# EAGLE board quad_sensor_board_v3 (EAGLE 9.0.0)
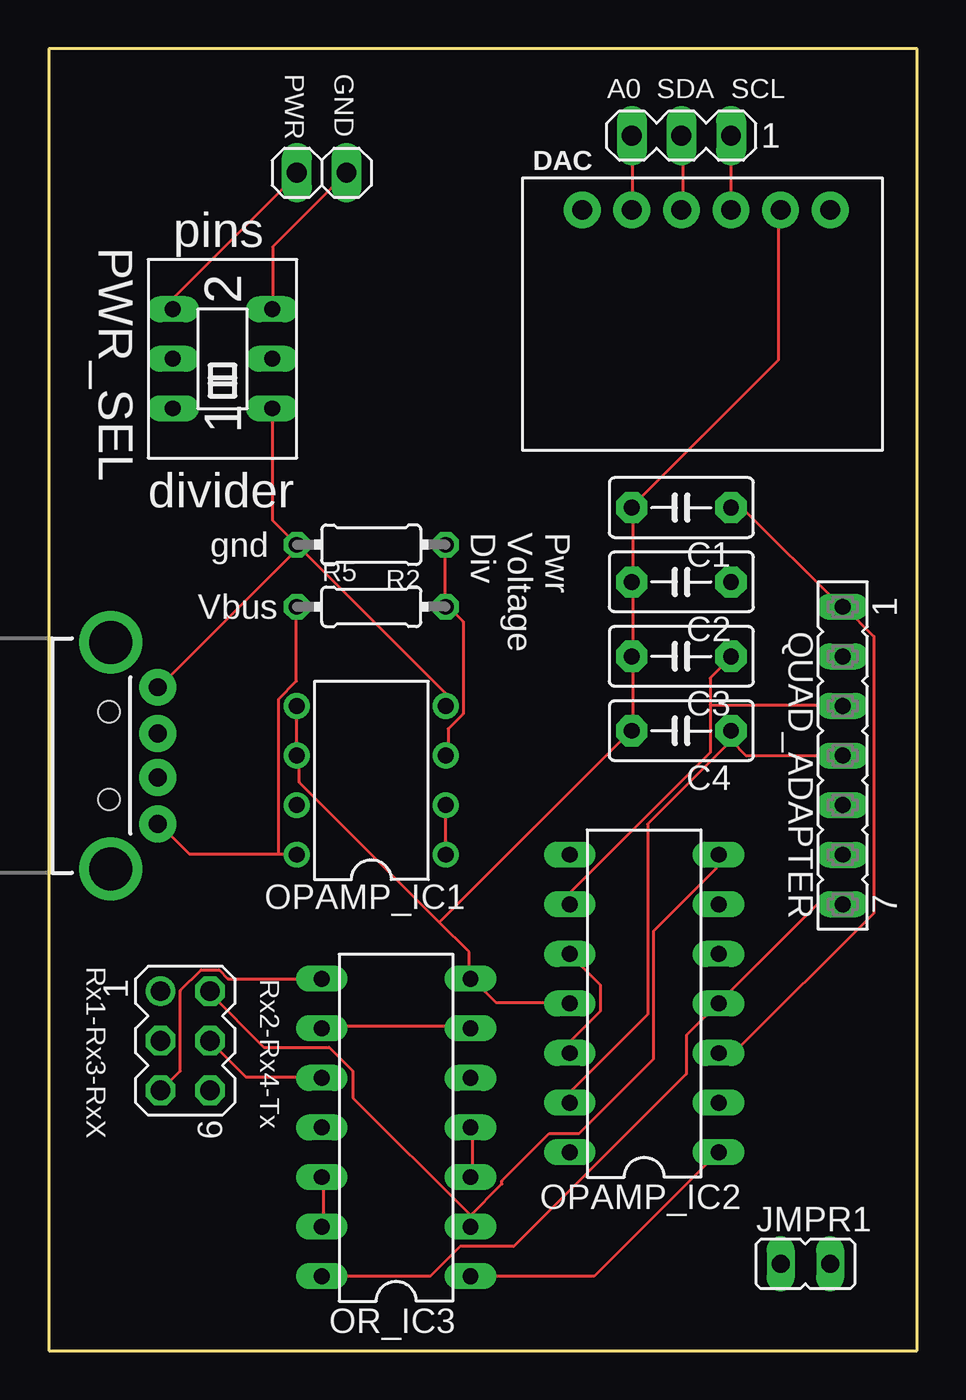
[diagram p0: board, top side]
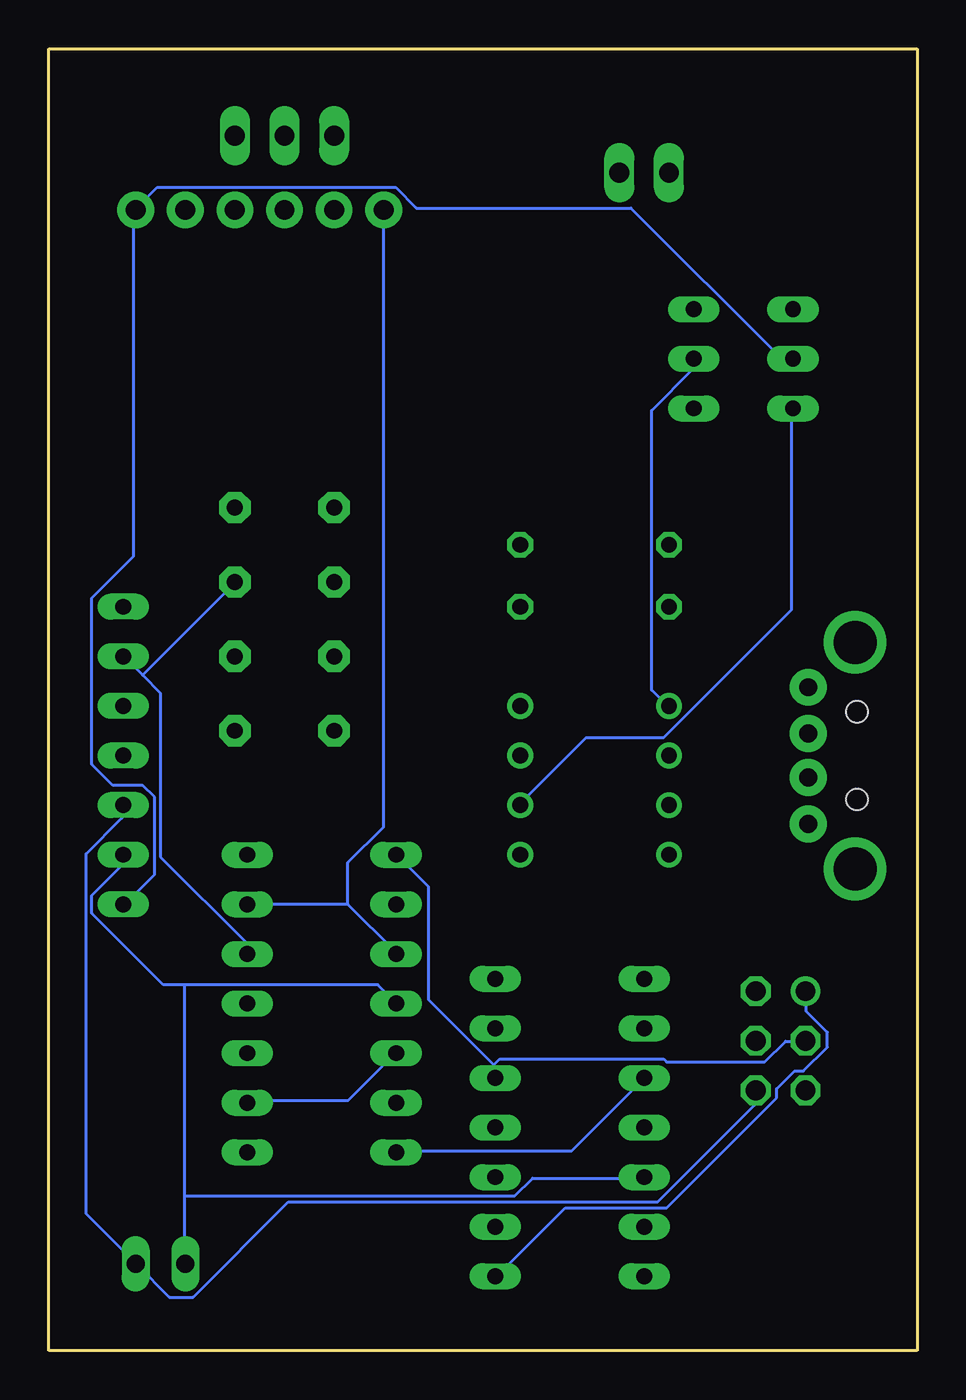
[diagram p1: board, bottom side, seen from below]

Size 44.45 x 66.67 mm. Coordinates in mm from the lower left corner, seen from the top.
Outline: 0,66.67 0,0 44.45,0 44.45,66.67 0,66.67
Copper layers (1*16): Top 0.035mm / dielectric 1.5mm / Bottom 0.035mm
Design rules "default": minimum track width 6mil, minimum drill 0.35mm, track to track 6mil, track to pad 6mil, pad to pad 6mil, via to via 6mil, smd to smd 6mil, copper to edge 40mil, drill to drill 6mil, minimum pad ring 10mil, minimum via ring 8mil, stop-mask expansion 4mil, vias tented up to drill 0mil, thermal gap 10mil

## Footprints (pad centres in the part's own frame; a part is rotated, then mirrored left to right if it is on the bottom)
C5B3 = drill 0.813 pad 1.6 octagon: 1 -2.54,0; 2 2.54,0
1X06_NO_SILK = drill 1.016 pad 1.88: 1 0,0; 2 2.54,0; 3 5.08,0; 4 7.62,0; 5 10.16,0; 6 12.7,0
MA03-1 = drill 1.016 long: 1 -2.54,0; 2 0,0; 3 2.54,0
MA03-2 = drill 1.016: 1 -2.54,-1.27 | drill 1.016 octagon: 2 -2.54,1.27; 3 0,-1.27; 4 0,1.27; 5 2.54,-1.27; 6 2.54,1.27
USB-A-H = drill 0.914 pad 1.88: D+ 2.4,1.127; D- 2.4,-1.127; GND 2.4,3.5; VBUS 2.4,-3.5 | drill 2.2: SHLD1 0,-5.8; SHLD2 0,5.8 | hole 1.1: -0.1,2.25; -0.1,-2.25
JP1 = drill 0.914 long: 1 0,-1.27; 2 0,1.27
DIL08 = drill 0.813 pad 1.27: 1 -3.81,-3.81; 2 -1.27,-3.81; 3 1.27,-3.81; 4 3.81,-3.81; 5 3.81,3.81; 6 1.27,3.81; 7 -1.27,3.81; 8 -3.81,3.81
DIL14 = drill 0.813 long: 1 -7.62,-3.81; 2 -5.08,-3.81; 3 -2.54,-3.81; 4 0,-3.81; 5 2.54,-3.81; 6 5.08,-3.81; 7 7.62,-3.81; 8 7.62,3.81; 9 5.08,3.81; 10 2.54,3.81; 11 0,3.81; 12 -2.54,3.81; 13 -5.08,3.81; 14 -7.62,3.81
1X02 = drill 1.016 long: 1 -1.27,0; 2 1.27,0
FE07 = drill 0.813 long: 1 -7.62,0; 2 -5.08,0; 3 -2.54,0; 4 0,0; 5 2.54,0; 6 5.08,0; 7 7.62,0
0204/7 = drill 0.813 octagon: 1 -3.81,0; 2 3.81,0
A68-A31 = drill 0.813 long: 1 -2.54,-2.54; 2 0,-2.54; 3 2.54,-2.54; 4 -2.54,2.54; 5 0,2.54; 6 2.54,2.54

## Placement (x,y rotation side)
C1  [C5B3]  32.38,43.18 180 top
C2  [C5B3]  32.38,39.37 180 top
C3  [C5B3]  32.38,35.56 180 top
C4  [C5B3]  32.38,31.75 180 top
DAC  [1X06_NO_SILK]  27.3,58.42 0 top
I2C  [MA03-1]  32.38,62.23 180 top
I/O  [MA03-2]  6.98,15.87 270 top
J1  USB_A_PTH_MALE  [USB-A-H]  3.18,30.48 0 top
JMPR1  [JP1]  38.73,4.45 270 top
OPAMP_IC1  LM358N  [DIL08]  16.51,29.21 90 top
OPAMP_IC2  LM324N  [DIL14]  30.48,17.78 90 top
OR_IC3  7432N  [DIL14]  17.78,11.43 90 top
PWR  [1X02]  13.97,60.33 0 top
QUAD_ADAPTER  [FE07]  40.64,30.48 270 top
R2  [0204/7]  16.51,41.27 180 top
R5  [0204/7]  16.51,38.1 0 top
S1  [A68-A31]  8.89,50.8 90 top

## Library data of the parts
C1-C4 = capacitor-wima
DAC = SparkFun-Connectors
I2C I/O = con-lstb; OC_FARNELL: unknown; OC_NEWARK: unknown
J1 = SparkFun-Connectors; PROD_ID: CONN-08367; SF_ID: PRT-00437
JMPR1 = jumper
OPAMP_IC1 OPAMP_IC2 = linear
OR_IC3 = 74xx-us
PWR = pinhead
QUAD_ADAPTER = con-lsta; OC_FARNELL: unknown; OC_NEWARK: unknown
R2 R5 = resistor
S1 = switch

## Nets
GND: C1.2 C2.2 C3.2 C4.2 DAC.5 JMPR1.1 OPAMP_IC1.5 OPAMP_IC1.6 OPAMP_IC2.11 OR_IC3.7 OR_IC3.12 OR_IC3.13 QUAD_ADAPTER.6 S1.2
N$1: OPAMP_IC1.3 R2.1 R5.2
N$2: J1.VBUS OPAMP_IC1.8 R5.1
N$3: OR_IC3.3 OR_IC3.4
N$4: I/O.4 OPAMP_IC2.14 OR_IC3.10
N$5: OPAMP_IC1.1 OPAMP_IC1.2 S1.4
N$6: OR_IC3.6 OR_IC3.9
N$7: DAC.4 I2C.1
N$8: DAC.3 I2C.2
N$9: DAC.2 I2C.3
N$11: I/O.1 OPAMP_IC2.1 OR_IC3.1
N$13: J1.GND OPAMP_IC1.4 R2.2 S1.1
N$14: PWR.2 S1.3
N$15: PWR.1 S1.6
OR_PIN: I/O.5 OR_IC3.8
RX_1: C1.1 OPAMP_IC2.3 QUAD_ADAPTER.1
RX_2: C2.1 OPAMP_IC2.5 QUAD_ADAPTER.2
RX_3: C3.1 OPAMP_IC2.9 QUAD_ADAPTER.3
RX_4: C4.1 OPAMP_IC2.13 QUAD_ADAPTER.4
RX_PIN1: I/O.3 OPAMP_IC2.8 OR_IC3.5
RX_PIN2: I/O.2 OPAMP_IC2.7 OR_IC3.2
THRESH: DAC.1 OPAMP_IC2.2 OPAMP_IC2.6 OPAMP_IC2.10 OPAMP_IC2.12
TX_1: I/O.6 JMPR1.2 QUAD_ADAPTER.5
VCC: DAC.6 OPAMP_IC2.4 OR_IC3.14 QUAD_ADAPTER.7 S1.5

## Tracks (layer width: path | path; a pad name or v marks a point on that pad's centre or on a via)
GND
  Top 0.152: DAC.5 37.36,58.37 37.36,50.75 29.9,43.28 C1.2 29.9,43.13 29.9,39.47 C2.2 29.9,39.32 29.9,35.66 C3.2 29.9,35.51 29.9,31.85 C4.2 29.74,31.7 19.99,21.95 | OPAMP_IC1.5 12.68,32.92 12.68,30.48 OPAMP_IC1.6 12.83,30.48 12.83,29.11 19.99,21.95 | OR_IC3.13 14.05,6.4 14.05,8.84 OR_IC3.12 | OPAMP_IC2.11 26.54,17.83 22.88,17.83 21.67,19.05 OR_IC3.7 21.51,19.05 21.51,20.42 19.99,21.95
  Bottom 0.152: S1.2 11.46,50.75 11.46,50.29 13.59,48.16 13.59,33.83 12.83,33.07 OPAMP_IC1.5 | 37.52,18.75 27.61,18.75 26.7,17.83 OPAMP_IC2.11 | 37.52,18.75 38.58,18.75 42.24,22.4 42.24,23.32 40.72,24.84 40.72,25.3 QUAD_ADAPTER.6 | 37.52,18.75 37.52,7.92 | 37.52,7.92 37.52,4.57 JMPR1.1 | 37.52,7.92 20.6,7.92 19.69,8.84 14.05,8.84 OR_IC3.12
N$1
  Top 0.152: OPAMP_IC1.3 20.45,30.48 20.45,31.85 21.21,32.61 21.21,37.34 20.45,38.1 R5.2 20.3,38.1 20.3,41.15 R2.1
N$2
  Top 0.152: 11.76,25.45 7.19,25.45 5.66,26.98 J1.VBUS | 11.76,25.45 12.68,25.45 OPAMP_IC1.8 | 11.76,25.45 11.76,33.38 12.68,34.29 12.68,38.1 R5.1
N$3
  Top 0.152: OR_IC3.3 21.67,8.99 21.67,11.43 OR_IC3.4
N$4
  Top 0.152: OR_IC3.10 13.89,14.02 10.08,14.02 8.26,15.85 I/O.4
  Bottom 0.152: OPAMP_IC2.14 26.54,10.21 17.7,10.21 14.05,13.87 OR_IC3.10
N$5
  Top 0.152: OPAMP_IC1.1 20.3,25.45 20.3,27.89 OPAMP_IC1.2
  Bottom 0.152: S1.4 6.43,48.16 6.43,37.95 12.98,31.39 16.94,31.39 20.3,28.04 OPAMP_IC1.2
N$6
  Top 0.152: OR_IC3.9 14.05,16.61 21.51,16.61 OR_IC3.6
N$7
  Top 0.152: DAC.4 I2C.1
N$8
  Top 0.152: I2C.2 32.49,62.18 32.49,58.52 DAC.3
N$9
  Top 0.152: I2C.3 29.9,62.18 29.9,58.52 DAC.2
N$11
  Top 0.152: OR_IC3.1 27.91,3.81 34.16,10.06 OPAMP_IC2.1
  Bottom 0.152: I/O.1 5.66,18.29 5.66,17.37 4.6,16.31 4.6,15.54 5.82,14.33 6.27,14.33 7.19,13.41 7.19,12.95 12.83,7.31 18.01,7.31 21.51,3.81 OR_IC3.1
N$13
  Top 0.152: 12.83,41.15 20.3,33.68 20.3,33.07 OPAMP_IC1.4 | S1.1 11.46,48.16 11.46,42.52 R2.2 12.83,41.15 | 12.83,41.15 5.66,33.98 J1.GND
N$14
  Top 0.152: PWR.2 11.46,56.54 11.46,53.34 S1.3
N$15
  Top 0.152: S1.6 6.43,53.34 6.43,53.95 12.68,60.2 PWR.1
OR_PIN
  Top 0.152: OR_IC3.8 9.17,19.05 8.71,19.51 7.8,19.51 6.73,18.44 6.73,14.33 5.82,13.41 I/O.5
RX_1
  Top 0.152: OPAMP_IC2.3 35.08,15.24 42.24,22.4 42.24,36.58 40.72,38.1 QUAD_ADAPTER.1 40.56,38.1 35.54,43.13 34.93,43.13 C1.1
RX_2
  Bottom 0.152: 39.65,34.59 40.56,35.51 QUAD_ADAPTER.2 | 39.65,34.59 38.73,33.68 38.73,25.3 34.31,20.88 34.31,20.42 OPAMP_IC2.5 | 39.65,34.59 34.93,39.32 C2.1
RX_3
  Top 0.152: 33.86,33.07 33.86,34.44 34.93,35.51 C3.1 | 33.86,33.07 33.86,30.63 26.7,23.47 26.7,22.86 OPAMP_IC2.9 | 33.86,33.07 40.56,33.07 QUAD_ADAPTER.3
RX_4
  Top 0.152: 34.93,31.24 30.66,26.98 30.66,17.22 26.7,13.26 26.7,12.8 OPAMP_IC2.13 | 34.93,31.24 C4.1 34.93,31.7 | QUAD_ADAPTER.4 35.69,30.48 34.93,31.24
RX_PIN1
  Bottom 0.152: 21.67,14.63 21.67,14.02 OR_IC3.5 | 21.67,14.63 25.02,17.98 25.02,23.77 26.54,25.3 OPAMP_IC2.8 | 21.67,14.63 21.36,14.94 12.98,14.94 12.83,14.78 7.8,14.78 6.73,15.85 5.82,15.85 I/O.3
RX_PIN2
  Top 0.152: 21.51,6.86 21.51,7.01 15.57,12.95 15.57,14.33 14.35,15.54 11,15.54 8.26,18.29 I/O.2 | 21.51,6.86 21.51,6.4 OR_IC3.2 21.51,6.86 | 21.51,6.86 23.19,8.53 23.19,8.69 25.63,11.12 27.15,11.12 30.96,14.94 30.96,21.49 34.16,24.69 34.16,25.3 OPAMP_IC2.7
THRESH
  Top 0.152: OPAMP_IC2.12 26.7,15.24 26.7,15.85 28.22,17.37 28.22,18.75 26.7,20.27 OPAMP_IC2.10
  Bottom 0.152: OPAMP_IC2.2 34.16,12.8 29.13,12.8 26.7,15.24 OPAMP_IC2.12 | 29.13,22.86 OPAMP_IC2.6 | 29.13,22.86 26.7,20.42 OPAMP_IC2.10 | DAC.1 27.3,26.82 29.13,24.99 29.13,22.86
TX_1
  Bottom 0.152: QUAD_ADAPTER.5 40.72,27.89 40.72,27.28 42.55,25.45 42.55,7.01 40.11,4.57 JMPR1.2 39.95,4.42 38.28,2.74 37.06,2.74 32.18,7.62 13.28,7.62 8.26,12.65 I/O.6
VCC
  Top 0.152: OR_IC3.14 19.53,3.81 21.06,5.33 23.8,5.33 32.64,14.17 32.64,16.15 34.16,17.68 OPAMP_IC2.4 34.31,17.83 39.34,22.86 QUAD_ADAPTER.7
  Bottom 0.152: S1.5 6.43,50.9 7.04,50.9 14.66,58.52 25.63,58.52 26.7,59.59 38.89,59.59 39.95,58.52 DAC.6 40.11,58.37 40.11,40.69 42.24,38.56 42.24,30.02 41.17,28.96 39.65,28.96 39.04,28.35 39.04,24.38 40.56,22.86 QUAD_ADAPTER.7

## Text on the board
tNames: PWR | GND | A0 | SDA | SCL | PWR_SEL | pins | divider | Pwr / Voltage / Div | gnd | Vbus | Rx1-Rx3-RxX | Rx2-Rx4-Tx